# Altium PCB AP.PcbDoc (part 2 of 3)
Units mm, origin at the board's own origin, x right, y up, seen from the top; angles counter-clockwise.
Board outline 75.1 x 75.1 mm, 2 copper layers (Top Layer, Bottom Layer); 135 components, 138 nets, 746 pads, 286 vias.
Unrouted connection lines stored in the file: 9.
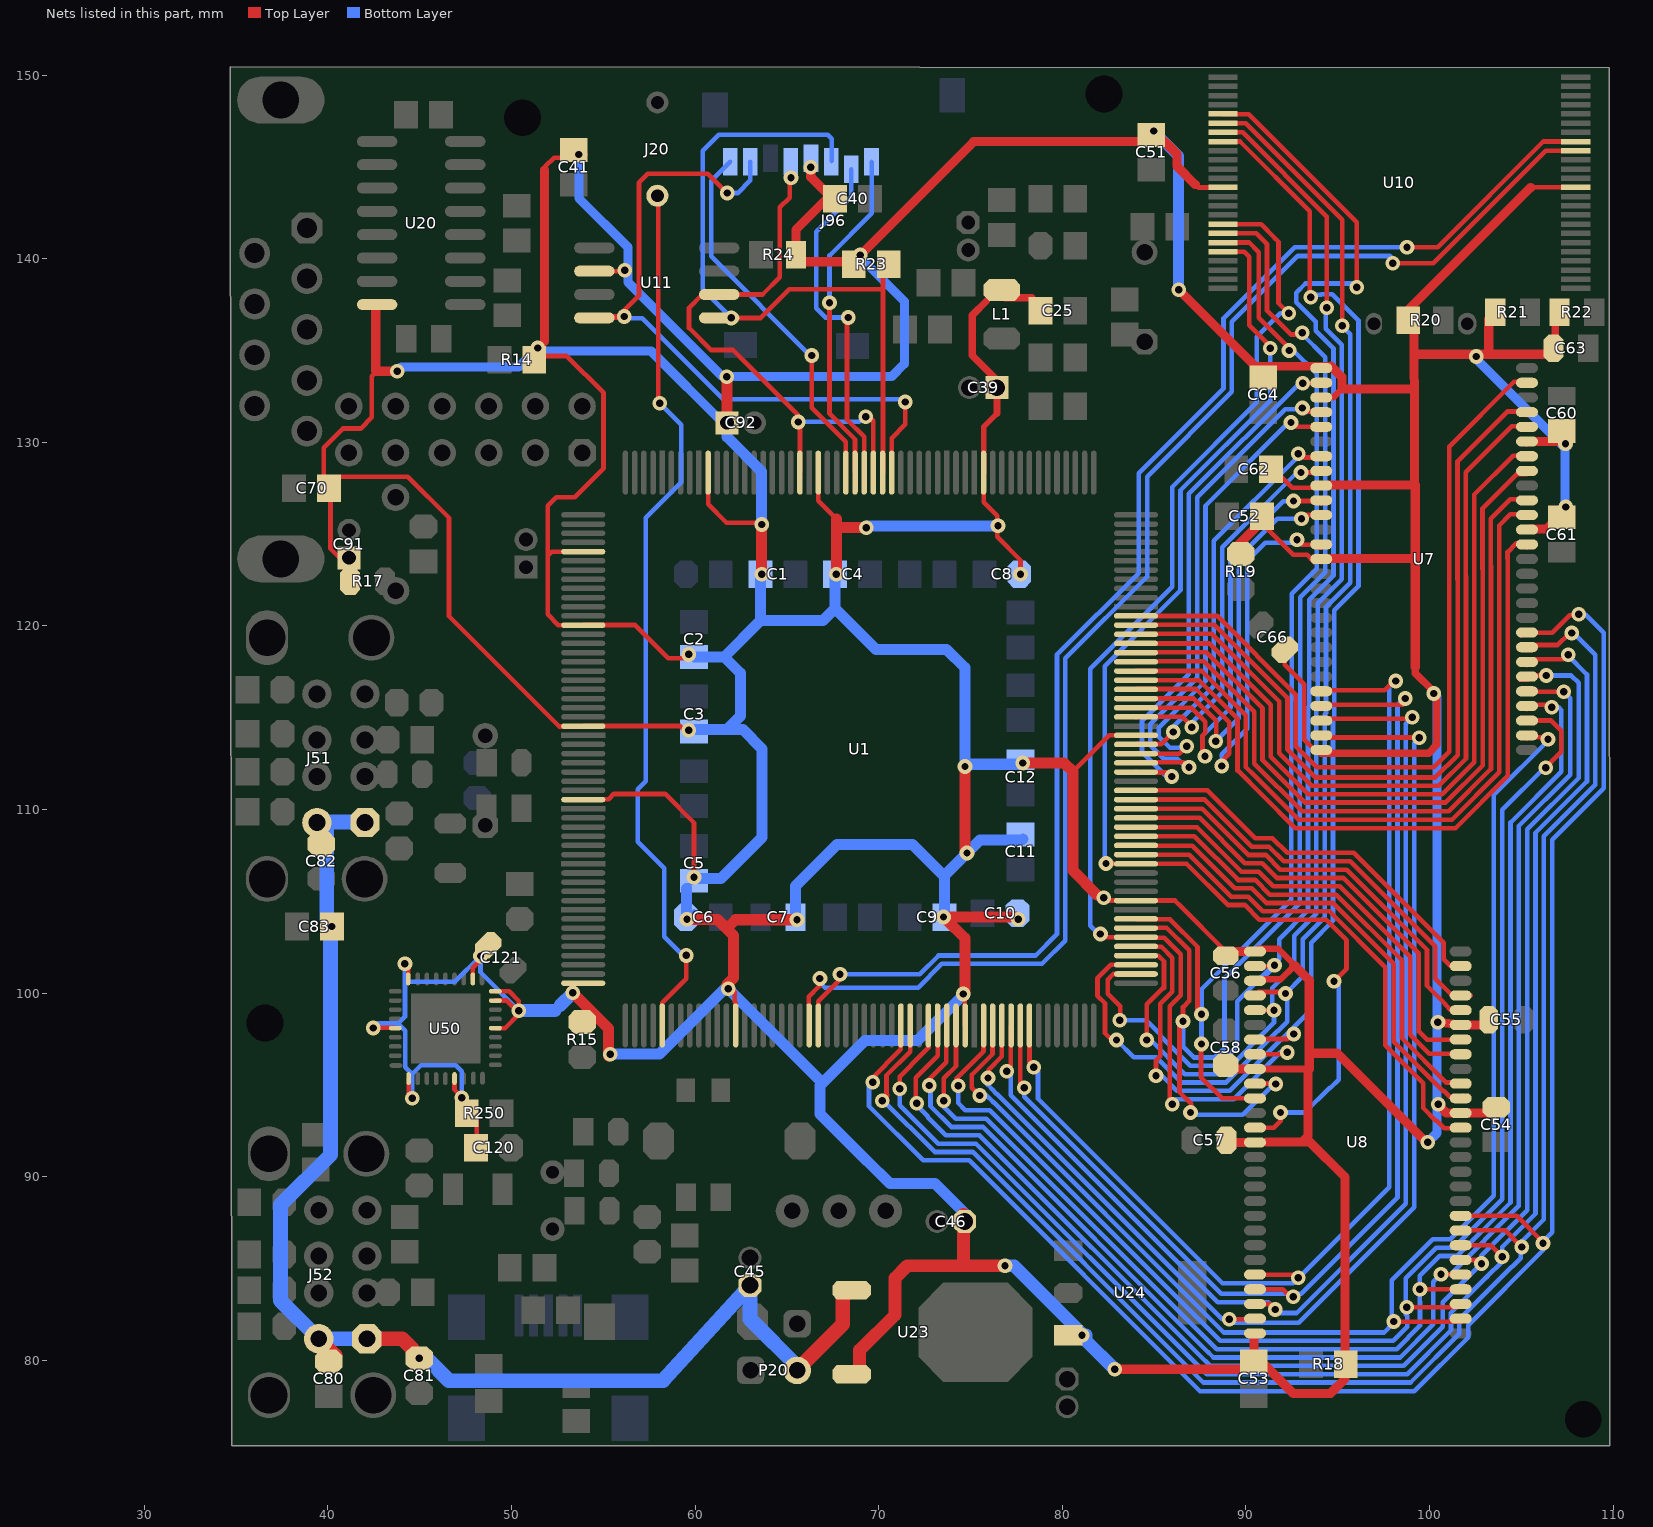
[diagram p2: the nets of this part, all layers, seen from the top]

## Via types
v1: diameter 0.8, hole 0.4, Top Layer to Bottom Layer, 277 vias
v2: diameter 0.66, hole 0.33, Top Layer to Bottom Layer, tented top, 9 vias

## Nets (pads, with @x,y where several pads share a name; then routed paths per layer and width w, separated by ;. In a path a pad name is that pad's centre, name@x,y a point inside that pad or via, vN(x,y) a via of type N, cw(c..) or ccw(c..) an arc to the next point about the centre after c; other vN are vias at no path point) (continued)
3V3: C1.2 C2.2 C3.2 C4.2 C5.2 C6.2 C7.2 C8.2 C9.2 C10.2 C11.2 C12.2 C25.2 C39.1 C40.1 C41.1 C46.1 C51.2 C52.2 C53.2 C54.2 C55.2 C56.2 C57.2 C58.2 C60.1 C61.1 C62.1 C63.1 C64.1 C66.1 C70.2 C91.1 C92.1 C120.1 C121.2 J96.4 L1.2 R14.2 R15.1 R17.1 R18.1 R19.1 R20.2 R21.2 R22.1 R23.2 R24.1 R250.2 U1.5 U1.13 U1.24 U1.32 U1.52 U1.65 U1.90 U1.114 U1.132 U1.169 U1.187 U1.199 U7.1 U7.3 U7.9 U7.14 U7.27 U7.43 U7.49 U8.1 U8.3 U8.9 U8.14 U8.27 U8.43 U8.49 U10.12 U10.37 U11.6 U20.16 U23.3 U24.3 U50.5 U50.10 U50.15 U50.23 U50.26 U50.27 U50.29 U50.36 | length 678.5
  Top Layer w0.2: U1.5@53.866,124.091 U1.5@53.911,124.046
  Top Layer w0.254: C70.2@40.025,127.508 39.775,127.758 39.775,129.7 40.825,130.75 41.787,130.75 42.4,131.363 42.4,133.596 42.679,133.875 ; C70.2@40.066,127.508 40.147,127.427 40.147,124.203 C91.1@41.148,123.202 ; C70.2@40.689,128.131 44.356,128.131 46.6,125.887 46.6,120.525 52.602,114.523 U1.24@52.832,114.523 ; v1@42.499,98.127 43.648,98.127 U50.5@43.675,98.1 ; U20.16@42.611,137.424 U20.16@42.685,137.498 ; v1@44.2,101.575 44.375,101.4 U50.36@44.375,100.775 ; U50.10@44.4,95.35 44.4,94.525 v1@44.6,94.325 ; U50.15@46.9,95.35 46.9,94.735 R250.2@47.865,93.769 ; U50.29@47.9,100.775 47.9,101.377 v1@48.315,101.792 ; 48.116,92.357 R250.2@48.116,93.518 ; v1(48.315,102.025) 48.548,102.025 48.745,102.222 C121.2@48.745,102.604 48.315,102.175 v1@48.315,101.792 ; U50.23@49.125,98.1 49.65,98.1 50.4,98.85 v1(50.4,99.05) 50.4,99.575 49.875,100.1 U50.27@49.125,100.1 ; U50.26@49.125,99.6 49.75,99.6 v1@50.35,99 ; C121.2@49.277,102.754 v1@48.315,101.792 ; R14.2@51.242,134.505 R14.2@51.435,134.698 ; 51.8,135.505 v1(51.435,135.14) R14.2@51.435,134.698 ; 51.85,145.025 52.324,145.499 53.524,145.499 53.583,145.557 53.583,145.583 v1(53.675,145.675) C41.1@54.05,145.675 ; 51.98,123.8 51.98,126.541 52.451,127.012 53.442,127.012 55.016,128.587 55.016,132.702 53.02,134.698 R14.2@51.435,134.698 ; v1@53.34,100.017 v1(53.342,100.017) ; U1.32@53.911,110.546 53.934,110.569 55.294,110.569 55.575,110.85 58.375,110.85 59.944,109.281 v1(59.944,106.311) ; U1.24@53.911,114.546 53.913,114.548 59.2,114.548 59.423,114.325 v1(59.65,114.325) ; U1.5@53.911,124.046 52.197,124.046 51.975,123.824 51.975,120.63 52.559,120.046 U1.13@53.911,120.046 53.913,120.048 56.748,120.048 58.547,118.249 59.563,118.249 59.65,118.336 v1(59.65,118.45) ; U11.6@54.512,139.319 56.294,139.319 v1@56.375,139.4 ; U1.199@60.711,128.346 60.713,128.344 60.713,126.624 61.712,125.625 63.275,125.625 63.501,125.399 v1@63.627,125.273 ; 61.722,100.723 61.69,100.691 v1@61.69,100.536 ; v1@61.776,100.45 v1@61.69,100.536 ; U1.65@62.211,98.246 62.209,98.248 62.209,99.473 62.161,99.521 62.161,100.065 v1@61.69,100.536 ; U1.187@66.711,128.346 66.713,128.344 66.713,126.812 67.691,125.834 ; R23.2@68.646,140.208 68.675,140.179 68.979,140.179 v1(69,140.2) ; v1(73.533,104.152) v1@73.66,104.025 ; v1@74.688,99.593 74.688,98.269 U1.90@74.711,98.246 U1.90@74.724,98.233 ; U1.169@75.711,128.346 75.713,128.344 75.713,126.737 76.454,125.996 76.454,124.853 77.724,123.583 v1(77.724,122.821) ; C39.1@76.442,132.981 C39.1@76.442,133.383 ; v1@77.47,104.152 v1(77.597,104.025) ; C25.2@78.331,137.875 C25.2@78.806,137.4 ; 80.572,112.066 82.55,114.044 84.009,114.044 U1.132@84.011,114.046 U1.132@84.034,114.023 ; v1@81.915,105.35 82.2,105.35 82.213,105.338 82.502,105.048 84.009,105.048 U1.114@84.011,105.046 84.013,105.048 86.134,105.048 86.444,104.738 86.444,104.733 88.806,102.371 C56.2@88.901,102.276 ; C51.2@84.7,147.125 84.812,147.132 C51.2@84.814,147.132 ; C51.2@84.711,147.236 C51.2@84.814,147.132 ; 87.244,144.035 87.398,143.881 U10.37@88.753,143.881 ; C57.2@88.834,91.44 89.015,91.44 89.5,91.925 ; U8.27@90.444,81.424 U8.27@90.496,81.476 ; U8.14@90.447,91.925 U8.14@90.496,91.876 91.15,91.876 91.126,91.9 ; C52.2@90.811,125.636 92.572,123.875 93.334,123.875 93.705,123.504 U7.14@93.705,123.481 ; C62.1@91.025,128.175 91.875,128.175 92.521,127.529 93.989,127.529 U7.9@94.102,127.642 ; C66.1@92.112,118.708 92.112,117.888 93.175,116.825 93.175,113.793 93.527,113.44 ; U7.14@94.029,123.545 U7.14@94.102,123.472 ; R20.2@98.7,136.425 R20.2@98.7,137.075 ; v1@100.475,93.917 v1(100.475,93.953) ; U8.43@101.32,93.476 U8.43@101.696,93.476 U8.43@101.688,93.484 ; C54.2@103.488,93.476 C54.2@103.801,93.789 ; U7.49@105.302,129.872 U7.49@105.382,129.952 ; 105.509,143.884 107.176,143.884 107.178,143.882 107.181,143.884 107.95,143.884 U10.12@107.953,143.881 ; 106.352,125.275 C61.1@107.301,126.224 ; v1@107.4,129.675 v1(107.4,129.925) ; C51.2@84.814,147.132 84.922,147.139 84.948,147.165 84.959,147.165 84.975,147.149 C51.2@84.975,146.972 ; C51.2@84.814,147.132 C51.2@84.975,146.972 ; C51.2@84.814,147.132 C51.2@84.975,146.972
  Top Layer w0.3: U1.169@75.711,128.346 75.711,130.841 76.442,131.572
  Top Layer w0.35: U8.3@90.496,100.676 90.576,100.755 91.899,100.755 92.6,101.456 92.6,101.475 92.6,101.58 91.755,102.425 91.732,102.425 ; U8.1@90.496,102.276 90.646,102.425 91.625,102.425 ; U7.3@94.102,132.442 94.755,132.442 95.225,132.912
  Top Layer w0.4: 75.875,137.7 75.1,136.925 75.1,134.725 C39.1@76.442,133.383 ; 76.442,131.572 C39.1@76.442,132.981 ; L1.2@76.883,137.875 C25.2@78.331,137.875 ; U8.9@90.496,95.876 93.382,95.876 ; U7.27@94.102,113.072 99.947,113.072 100.4,113.525 100.4,116.15 v1(100.225,116.325) 100.225,116.431 99.225,117.431 99.225,117.75 ; C63.1@106.85,135.65 R22.1@106.85,136.575
  Top Layer w0.45: C64.1@90.506,134.143 U7.1@94.632,134.143
  Top Layer w0.5: U20.16@42.611,137.424 42.611,133.903 42.679,133.875 v1(43.775,133.875) ; 51.8,135.505 51.8,144.825 ; R24.1@65.493,140.208 65.493,141.568 C40.1@67.181,143.256 ; R24.1@65.725,139.838 R23.2@68.2,139.838 ; v1(66.3,144.975) 66.3,144.45 67.27,143.48 C40.1@67.406,143.48 ; R23.2@69.127,140.327 75.175,146.375 C51.2@84.378,146.375 ; v1(82.85,79.525) 90.001,79.525 C53.2@90.424,79.948 ; C51.2@84.793,146.789 C51.2@84.378,146.375 ; v1(86.348,138.302) C64.1@90.506,134.143 ; 87.244,144.035 86.247,145.032 86.247,145.7 84.975,146.972 84.964,146.961 C51.2@84.378,146.375 ; C56.2@88.901,102.276 U8.1@90.496,102.276 ; C57.2@89.375,91.875 U8.14@90.322,91.875 ; R19.1@89.459,124.284 C52.2@90.811,125.636 ; C58.2@89.495,95.876 U8.9@90.496,95.876 ; U8.27@90.444,81.424 90.444,80.331 92.575,78.2 94.6,78.2 95.4,79 95.4,89.975 93.475,91.9 91.126,91.9 ; 92.6,101.475 92.682,101.475 93.45,100.707 93.45,95.876 ; 93.075,91.9 93.382,92.207 93.382,95.876 ; 93.45,96.725 94.975,96.725 99.841,91.859 v1@99.841,91.816 ; U7.9@94.305,127.675 99.225,127.675 99.225,117.75 ; U7.1@94.632,134.143 95.225,133.55 95.225,132.912 ; U7.14@94.676,123.67 99,123.67 ; 95.272,132.906 99.15,132.906 ; R20.2@98.7,137.075 105.509,143.884 ; R20.2@98.7,137.16 99.15,136.71 99.15,134.35 99.175,132.481 99.175,127.7 ; 99.15,134.8 C63.1@106.625,134.8 ; v1(100.455,98.422) U8.49@101.696,98.276 C55.2@102.776,98.276 ; v1@100.475,93.917 100.908,93.484 U8.43@101.688,93.484 ; U8.43@101.696,93.476 C54.2@103.488,93.476 ; 103.225,134.875 R21.2@103.225,136.683 ; U7.49@105.382,130.052 C60.1@107.188,130.052 ; U7.43@105.505,125.275 106.352,125.275 C61.1@107.35,126.273
  Top Layer w0.6: v1@53.341,100.018 v1(53.342,100.017) 55.287,98.071 v1@55.287,96.587 ; v1(59.563,104.025) 61.214,104.025 61.722,103.517 ; v1(61.723,133.575) 61.75,133.548 C92.1@61.75,131.064 ; v1@61.751,100.476 62.1,100.825 62.1,103.139 61.722,103.517 ; v1(63.627,122.821) v1@63.627,125.273 ; v1(65.55,104) 62.205,104 61.722,103.517 ; v1(67.691,122.821) 67.691,125.35 ; 67.691,125.834 67.691,125.35 ; v1(69.331,125.35) 67.691,125.35 ; v1(73.533,104.152) v1@77.47,104.152 ; v1@73.66,104.025 74.688,102.997 v1@74.688,99.96 ; v1(74.7,112.35) 74.7,107.75 v1(74.812,107.637) ; v1(77.851,112.534) 80.104,112.534 80.572,112.066 80.572,106.675 81.897,105.35 v1@81.915,105.35
  Top Layer w0.7: R17.1@41.148,122.073 C91.1@41.148,123.71 ; U23.3@68.964,79.714 68.964,80.564 70.882,82.482 70.882,84.482 71.557,85.157 74.625,85.157 ; C46.1@74.625,87.96 74.625,85.157 ; v1(76.882,85.157) 74.625,85.157
  Bottom Layer w0.254: v1(42.477,98.105) 42.722,98.35 43.825,98.35 ; v1(43.775,133.875) v1@44,134.1 ; v1(44.2,101.6) 44.2,100.625 ; v1(44.6,94.275) 44.6,95.6 ; v1(47.3,94.3) 47.3,95.748 46.973,96.075 45.075,96.075 44.6,95.6 ; v1(50.4,99.05) 48.315,101.135 v1(48.315,102.025) 46.915,100.625 44.2,100.625 ; v1(51.435,135.14) v1@51.6,134.975 ; v1@56.35,139.4 56.35,140.625 ; C6.2@59.502,104.025 59.532,104.055 C6.2@59.944,104.467 ; C5.2@59.533,105.711 C5.2@59.944,106.123 59.948,106.127 C5.2@59.948,106.307 ; v1(59.944,106.311) C5.2@59.948,106.307 ; C3.2@59.944,114.251 C3.2@60.043,114.35 ; C5.2@60.005,106.25 C5.2@59.948,106.307 ; C1.2@63.566,122.821 v1(63.627,122.821) ; C4.2@67.63,122.821 v1(67.691,122.821) ; v1@74.397,99.95 74.402,99.955 74.629,99.955 74.672,99.912 74.672,99.905 74.668,99.901 v1(74.607,99.96) ; C8.2@77.658,122.821 v1(77.724,122.821) ; v1@99.841,91.816 99.839,91.818 99.839,91.821 v1@99.841,91.823 ; v1@107.377,126.523 v1(107.425,126.475) ; 43.825,98.35 44.225,97.95 44.225,95.975 44.6,95.6 ; 43.825,98.35 44.2,98.725 44.2,100.625
  Bottom Layer w0.4: v1(100.225,116.325) v1@100.4,116.15 ; v1@100.4,98.367 v1@100.406,98.361
  Bottom Layer w0.5: v1@44,134.1 50.395,134.1 v1(51.435,135.14) ; v1@51.6,134.975 57.602,134.975 C92.1@61.624,130.954 ; v1(53.675,145.675) 53.675,143.3 56.35,140.625 56.35,139.4 56.35,138.725 61.488,133.587 70.712,133.587 71.4,134.275 71.4,137.675 69.1,139.975 v1@69.1,140.3 ; v1@99.841,91.823 100.406,92.388 v1@100.406,98.361 ; v1@100.4,98.367 v1@100.4,116.15 ; v1@102.476,134.601 107.377,129.7 v1@107.377,126.523
  Bottom Layer w0.6: v1@55.575,96.7 58.075,96.7 61.716,100.341 66.8,95.258 ; C6.2@59.533,104.056 C5.2@59.533,105.711 ; C2.2@59.944,118.315 61.59,118.315 63.566,120.291 ; C5.2@60.005,106.25 61.425,106.25 63.65,108.475 63.65,113.3 62.6,114.35 61.725,114.35 ; C3.2@60.043,114.35 61.725,114.35 ; 61.59,118.31 62.475,117.425 62.475,115.1 61.725,114.35 ; C92.1@61.734,131.064 61.734,130.302 63.627,128.409 v1(63.627,125.525) ; C1.2@63.566,122.821 63.566,120.291 ; C7.2@65.466,104.14 65.466,105.841 67.725,108.1 71.85,108.1 73.594,106.356 ; C4.2@67.63,122.821 67.63,120.955 ; v1(69.331,125.35) 69.431,125.45 v1(76.5,125.45) ; 69.36,90.87 66.8,93.43 66.8,94.975 69.25,97.425 72.125,97.425 v1@74.634,99.934 ; 69.365,90.875 70.615,89.625 73.075,89.625 74.68,88.02 C46.1@74.68,87.567 ; C9.2@73.594,104.025 C9.2@73.594,104.14 73.594,104.152 73.594,106.356 ; C11.2@77.724,108.35 75.525,108.35 v1(74.812,107.637) 73.594,106.419 73.594,106.356 ; C12.2@77.724,112.468 74.7,112.468 74.7,117.725 73.7,118.725 69.86,118.725 67.63,120.955 ; C11.2@77.797,108.35 C11.2@77.851,108.404 ; v1(84.975,146.95) 86.334,145.591 86.334,138.316 v1(86.348,138.302) ; 63.566,120.291 66.966,120.291 67.63,120.955
  Bottom Layer w0.7: v1(50.4,99.05) 52.373,99.05 ; 52.636,99.314 v1@53.34,100.017 ; v1(76.882,85.157) 77.368,85.157 v1@81.111,81.414 ; v1@81.297,81.378 81.297,81.078 v1(82.85,79.525)
  other v1: 81.075,81.378 99.905,91.879 55.375,96.675 61.801,100.25 82.252,105.194 102.55,134.675 56.175,139.375
5V: C45.1 C80.1 C81.1 C82.1 C83.1 J51.1 J51.5 J52.1 J52.5 P20.2 U23.1 | length 72
  Top Layer w0.254: C83.1@40.423,103.783 C83.1@40.574,103.632
  Top Layer w0.8: J52.5@39.466,81.209 C80.1@40.388,80.288 ; J52.1@42.126,81.18 42.132,81.174 44.051,81.174 C81.1@44.597,80.628 ; P20.2@65.264,79.527 65.602,79.527 68.05,81.975 68.05,83.45 68.361,83.761 U23.1@69.098,83.761
  Bottom Layer w0.8: v1(40.224,103.632) 40.373,103.632 40.4,103.605 v1@40.4,103.575 ; J51.1@41.619,109.175 41.469,109.325 40.125,109.325 39.95,109.15 39.95,104.025 v1@40.4,103.575 ; J52.1@42.126,81.18 J52.5@39.506,81.18 37.425,83.261 37.425,88.475 40.15,91.2 40.15,103.325 v1@40.4,103.575 ; v1@44.916,80.059 45.441,80.059 46.6,78.9 58.263,78.9 C45.1@62.992,84.086 62.992,82.258 P20.2@65.678,79.572
  other v1: 44.979,80.123
A2: U1.97 U7.23 U8.23 | length 64.3
  Top Layer w0.254: U1.97@78.211,98.246 78.211,96.214 v1(78.45,95.975) ; U8.23@90.496,84.676 90.873,84.676 92.525,84.676 92.701,84.499 v1(92.85,84.499) ; U7.23@94.102,116.272 94.33,116.5 97.55,116.5 98.086,117.036 98.125,117.036 v1(98.155,117.006)
  Bottom Layer w0.254: v1(78.45,95.975) 78.675,95.75 78.675,94.25 88.723,84.202 92.577,84.202 97.803,89.428 97.803,113.227 97.799,113.231 97.799,116.749 98.086,117.036 98.125,117.036 v1(98.155,117.006)
A3: U1.96 U7.24 U8.24 | length 65.3
  Top Layer w0.254: U1.96@77.711,98.246 77.711,95.064 v1(77.925,94.849) ; U8.24@90.496,83.876 91.999,83.876 92.4,83.475 v1(92.575,83.475) ; U7.24@94.102,115.472 94.187,115.557 94.33,115.7 98.55,115.7 v1@98.688,115.838
  Bottom Layer w0.254: v1(77.925,94.849) 77.925,94.358 88.658,83.625 93.004,83.625 98.257,88.878 98.257,113.415 98.253,113.42 98.253,115.678 98.625,116.05 v1(98.675,116.05)
A4: U1.95 U7.25 U8.25 | length 65.6
  Top Layer w0.254: v1(76.975,95.75) 76.967,95.75 76.948,95.769 76.948,95.834 77.198,96.083 77.198,98.233 U1.95@77.211,98.246 ; U8.25@90.496,83.076 91.299,83.076 91.627,82.748 v1(91.6,82.775) ; U7.25@94.38,114.95 98.818,114.95 v1@98.891,114.877 ; v1@98.891,114.867 98.902,114.856 98.905,114.856 99.05,115.001 v1(99.05,115.025)
  Bottom Layer w0.254: v1(76.975,95.75) 77.198,95.527 77.198,94.443 88.47,83.171 91.204,83.171 91.791,82.584 92.759,82.584 98.711,88.536 98.711,113.603 98.707,113.608 98.707,114.682 v1(99.05,115.025)
A5: U1.94 U7.26 U8.26 | length 67.6
  Top Layer w0.254: v1@76,95.38 76,95.841 76.711,96.552 U1.94@76.711,98.246 ; v1(89.1,82.25) 90.471,82.25 U8.26@90.496,82.276 U8.26@90.873,82.276 ; U7.26@94.102,114.1 94.277,113.925 99.292,113.925 99.301,113.934 99.409,113.934 v1(99.434,113.909)
  Bottom Layer w0.254: v1@75.925,95.38 75.925,95.028 76.227,94.726 76.227,94.719 76.414,94.532 76.429,94.532 88.711,82.25 v1(89.1,82.25) 89.302,82.048 92.873,82.048 99.165,88.34 99.165,113.64 v1(99.434,113.909)
  other v1: 75.957,95.383
A6: U1.93 U7.29 U8.29 | length 73.8
  Top Layer w0.254: v1(75.5,94.425) 75.075,94.85 75.075,95.558 75.171,95.654 76.2,96.683 76.2,98.235 U1.93@76.211,98.246 ; v1(98.05,82.125) 98.075,82.1 101.748,82.1 101.808,82.159 101.808,82.164 U8.29@101.696,82.276 ; U7.29@105.302,113.872 105.377,113.947 106.078,113.947 106.2,113.825 v1(106.45,113.825)
  Bottom Layer w0.254: v1(75.5,94.425) 75.879,94.425 76.226,94.078 76.241,94.078 88.523,81.796 88.526,81.796 88.799,81.523 97.523,81.523 97.95,81.95 97.95,84.374 100.176,86.6 101.124,86.6 103.501,88.977 103.501,110.801 v1@106.487,113.787 ; v1(98.05,82.125) v1@98.05,82.35
A7: U1.92 U7.30 U8.30 | length 76.7
  Top Layer w0.254: v1(74.329,94.963) 74.241,95.051 74.241,95.366 75.5,96.625 75.711,96.836 U1.92@75.711,98.246 ; v1(98.75,82.9) 101.521,82.9 U8.30@101.696,83.076 ; U7.30@105.505,114.875 105.532,114.848 106.627,114.848 107.177,114.298 107.177,113.152 106.325,112.3 v1(106.325,112.275)
  Bottom Layer w0.254: v1@74.562,94.963 v1(74.329,94.963) 74.329,94.021 74.726,93.624 76.053,93.624 88.335,81.342 88.338,81.342 88.611,81.069 98.022,81.069 98.777,81.824 98.777,82.426 ; 98.7,82.503 98.7,84.482 100.364,86.146 101.312,86.146 103.955,88.789 103.955,109.98 106.268,112.293 106.307,112.293 v1(106.325,112.275)
A8: U1.89 U7.31 U8.31 | length 78.2
  Top Layer w0.254: v1(73.55,94.15) 73.55,95.36 74.211,96.021 U1.89@74.211,98.246 ; v1@99.476,83.876 U8.31@101.696,83.876 ; U7.31@105.302,115.472 105.53,115.7 106.425,115.7 v1@106.6,115.525
  Bottom Layer w0.254: v1(73.55,94.15) 73.55,93.825 74.205,93.17 75.865,93.17 88.147,80.888 88.15,80.888 88.423,80.615 98.21,80.615 99.477,81.882 99.477,83.201 99.475,83.203 99.475,84.615 100.552,85.692 101.5,85.692 104.409,88.601 104.409,109.294 107.177,112.062 107.177,115.423 107.025,115.575 v1(106.65,115.575)
  other v1: 99.475,83.875
A9: U1.88 U7.32 U8.32 | length 79.7
  Top Layer w0.254: v1@72.7,94.975 72.7,95.26 73.688,96.248 73.688,98.223 U1.88@73.711,98.246 ; v1(100.625,84.7) U8.32@101.672,84.7 ; U8.32@101.696,84.676 U8.32@102.183,84.676 ; U7.32@105.825,116.425 v1(107.3,116.425)
  Bottom Layer w0.254: v1(72.75,94.975) 72.823,94.902 72.823,93.849 73.956,92.716 75.677,92.716 87.959,80.434 87.962,80.434 88.235,80.161 98.398,80.161 100.202,81.965 100.202,84.277 v1(100.625,84.7) 101.15,84.7 104.863,88.413 104.863,109.106 107.659,111.902 107.659,116.066 v1(107.3,116.425)
A10: U1.87 U7.33 U8.33 | length 83.1
  Top Layer w0.254: v1@72.019,94 72.019,95.394 73.211,96.586 U1.87@73.211,98.246 ; U8.33@101.696,85.476 101.704,85.467 102.668,85.467 v1@102.825,85.31 ; U7.33@104.925,117.072 105.372,117.072 105.6,117.3 v1(106.35,117.3) ; v1(106.35,117.3) 106.366,117.284 v1(106.35,117.3)
  Bottom Layer w0.254: v1@71.967,94 72.679,93.288 72.679,93.246 73.663,92.262 75.489,92.262 87.771,79.98 87.774,79.98 88.047,79.707 98.586,79.707 100.713,81.834 100.713,83.163 v1(102.825,85.275) 102.825,85.694 105.317,88.186 105.317,108.918 108.117,111.718 108.117,116.908 107.725,117.3 v1(106.35,117.3)
  other v1: 72.075,94
A11: U1.86 U7.34 U8.34 | length 87.3
  Top Layer w0.254: v1(71.15,94.8) 71.15,95.46 72.409,96.719 72.711,97.021 U1.86@72.711,98.246 ; U8.34@101.696,86.276 103.324,86.276 v1(103.95,85.65) ; U7.34@105.302,117.872 105.61,118.181 107.306,118.181 v1(107.55,118.425)
  Bottom Layer w0.254: v1(71.15,94.8) 71.15,93.897 73.239,91.808 75.301,91.808 87.583,79.526 87.586,79.526 87.859,79.253 98.774,79.253 101.167,81.646 101.167,82.592 103.123,84.548 103.126,84.548 103.95,85.372 103.95,86.177 105.771,87.998 105.771,108.73 108.571,111.53 108.571,117.356 107.55,118.377 v1(107.55,118.425)
A13: U1.84 U7.35 U8.35 | length 91.6
  Top Layer w0.254: v1(70.2,94.15) 70.45,94.4 70.45,94.472 70.423,94.499 70.423,95.519 71.711,96.807 U1.84@71.711,98.246 ; U8.35@101.695,87.143 101.695,87.077 U8.35@101.696,87.076 ; U8.35@101.7,87.083 104.117,87.083 v1(105.025,86.175) ; U7.35@105.202,118.782 105.202,118.771 105.217,118.757 U7.35@105.302,118.672 ; U7.35@105.775,118.964 106.989,118.964 107.6,119.575 v1@107.749,119.575
  Bottom Layer w0.254: v1(70.2,94.15) 70.255,94.15 73.051,91.354 75.113,91.354 87.395,79.072 87.398,79.072 87.671,78.799 98.962,78.799 101.621,81.458 101.621,82.238 104.481,85.098 104.501,85.098 104.975,85.572 104.975,86.425 106.225,87.675 106.225,108.542 109.025,111.342 109.025,118.425 v1@107.794,119.656
  other v1: 107.749,119.612
A14: U1.83 U7.36 U8.36 | length 97.6
  Top Layer w0.254: v1@69.56,95.298 71.211,96.949 U1.83@71.211,98.246 ; v1(69.678,95.155) 69.697,95.155 v1@69.701,95.151 ; U8.36@101.686,87.866 U8.36@101.687,87.865 ; U8.36@101.696,87.876 104.749,87.876 106.175,86.45 v1(106.175,86.375) ; U7.36@105.001,119.481 105.162,119.642 U7.36@105.302,119.642 105.31,119.634 106.684,119.634 107.625,120.575 108.125,120.575 108.13,120.58 v1(108.13,120.631) ; U8.36@101.687,87.865 101.803,87.769 U8.36@101.687,87.865
  Bottom Layer w0.254: v1(69.678,95.155) 69.473,94.949 69.473,93.849 72.422,90.9 74.925,90.9 87.5,78.325 99.175,78.325 102.1,81.25 102.1,81.925 106.191,86.016 106.191,86.366 106.182,86.375 v1(106.175,86.375) ; v1@106.125,86.425 106.679,86.979 106.679,108.354 109.479,111.154 109.479,119.621 108.5,120.6 v1@108.13,120.6
ALE: U1.74 U10.17 | length 76.5
  Top Layer w0.254: U1.74@66.711,98.246 66.711,99.558 67.85,100.697 v1@67.85,101.025 ; v1(98.775,140.625) 100.442,140.625 106.198,146.381 U10.17@107.953,146.381 U10.17@107.93,146.404
  Bottom Layer w0.254: v1(67.89,101.025) 72.234,101.025 73.258,102.049 78.541,102.049 79.709,103.217 79.709,118.422 84.167,122.88 84.167,128.318 88.782,132.933 88.782,136.756 92.651,140.625 v1(98.775,140.625)
CLE: U1.73 U10.16 | length 78.1
  Top Layer w0.254: U1.73@66.211,98.246 66.234,98.269 66.234,99.291 66.2,99.325 66.2,99.817 66.775,100.392 v1@66.775,100.8 ; v1(98,139.75) 100.209,139.75 106.334,145.875 107.947,145.875 U10.16@107.953,145.881
  Bottom Layer w0.254: v1(66.8,100.8) 66.8,100.575 67.077,100.298 72.149,100.298 73.446,101.595 78.894,101.595 80.163,102.864 80.163,118.234 84.621,122.692 84.621,128.13 89.236,132.745 89.236,136.567 92.819,140.15 97.837,140.15 98,139.987 v1(98,139.75)
CLK: J96.5 U1.181 U1.189 U11.2 | length 30.5
  Top Layer w0.254: v1@65.15,144.325 65.15,143.325 64.616,142.791 64.616,138.991 63.674,138.049 U11.2@61.312,138.049 61.263,138 60.35,138 59.675,137.325 59.675,136.225 60.875,135.025 62.07,135.025 65.625,131.47 v1@65.625,131.125 ; v1(65.628,131.106) 65.644,131.106 65.711,131.039 U1.189@65.711,128.346 ; v1(69.3,131.4) 69.475,131.4 69.711,131.164 U1.181@69.711,128.346
  Bottom Layer w0.254: v1(65.628,131.106) 65.647,131.125 66.688,131.125 66.698,131.115 68.94,131.115 v1@69.263,131.437
  other v1: 65.225,144.4
CMD: J96.3 R23.1 U1.180 U11.1 | length 40.6
  Top Layer w0.254: U11.1@61.312,136.779 61.971,136.779 v1(61.975,136.775) ; U11.1@61.37,136.774 63.574,136.774 65.127,138.327 70.231,138.327 ; U1.180@70.231,128.366 70.231,138.069 70.231,139.296 70.635,139.7 R23.1@70.635,140.208
  Bottom Layer w0.254: v1(61.975,136.775) 60.421,138.329 60.421,145.871 61.3,146.75 67.225,146.75 67.45,146.525 J96.3@67.45,145.318
CS: J20.1 U1.57 | length 48.7
  Top Layer w0.254: J20.1@58,143.725 58,132.2 v1(58.075,132.125) ; U1.57@58.211,98.246 58.211,99.471 59.525,100.785 v1(59.525,102.058)
  Bottom Layer w0.254: v1(58.075,132.125) 59.246,130.954 59.246,127.816 57.319,125.889 57.319,122.625 57.322,122.622 57.322,111.547 56.875,111.1 56.875,108.253 58.327,106.801 58.327,103.068 59.337,102.058 v1(59.525,102.058)
D0: U1.106 U8.2 U10.29 | length 74.8
  Top Layer w0.254: v1@83.15,98.55 83.15,99.3 82.484,99.966 82.484,100.744 82.786,101.046 U1.106@84.011,101.046 ; U10.29@88.753,147.881 88.776,147.858 90.159,147.858 96.036,141.981 v1(96.036,138.439) ; U8.2@90.496,101.476 91.542,101.476 91.554,101.507 v1(91.554,101.53)
  Bottom Layer w0.254: v1(83.125,98.525) 84.562,98.525 85.331,97.756 85.331,97.683 86.966,96.048 88.49,96.048 89.52,97.078 89.52,99.555 90.633,100.668 v1@91.525,101.56 ; 91.1,100.996 91.583,101.479 v1@91.525,101.56 ; v1(96.036,138.439) 95.825,138.65 93.245,138.65 92.748,138.153 92.748,137.63 93.802,136.576 93.802,136.087 94.765,135.125 94.765,122.729 93.456,121.42 93.456,118.772 93.456,115.636 93.378,115.558 93.378,104.503 91.817,102.942 91.817,101.852 v1@91.525,101.56
D1: U1.107 U8.4 U10.30 | length 73.8
  Top Layer w0.254: v1(82.95,97.45) 82.7,97.45 82.325,97.825 82.325,99.456 81.915,99.866 81.915,100.817 82.644,101.546 U1.107@84.011,101.546 ; U10.30@88.753,147.381 89.994,147.381 95.25,142.125 v1(95.25,136.35) ; U8.4@90.496,99.876 90.556,99.936 90.686,100.065 v1@92.225,100.065
  Bottom Layer w0.254: v1(82.95,97.45) 83.89,96.51 85.118,96.51 86.489,95.14 88.919,95.14 91.736,97.956 91.772,97.956 91.873,98.057 91.873,98.076 92.253,98.456 92.253,99.947 v1@92.225,99.975 ; v1(92.154,99.98) 93.096,100.921 93.096,102.937 94.286,104.127 94.286,115.182 94.364,115.26 94.364,119.148 94.364,121.044 95.673,122.353 95.673,135.877 v1@95.225,136.325
D2: U1.108 U8.5 U10.31 | length 69.7
  Top Layer w0.254: U1.108@84.011,102.046 85.236,102.046 85.538,101.744 85.538,100.275 85.475,100.275 84.604,99.404 v1(84.604,97.455) ; U10.31@88.753,146.881 89.819,146.881 94.405,142.295 v1(94.405,137.332) ; U8.5@90.496,99.076 v1(91.526,99.076)
  Bottom Layer w0.254: v1(84.604,97.455) 84.604,97.452 84.606,97.45 84.82,97.45 86.677,95.594 88.731,95.594 91.526,98.388 v1(91.526,99.076) 91.427,99.174 91.427,100.284 92.637,101.493 92.637,103.12 93.832,104.315 93.832,115.37 93.91,115.448 93.91,118.96 93.91,121.232 95.219,122.541 95.219,135.313 94.35,136.181 94.35,137.291 94.391,137.332 v1(94.405,137.332)
D3: U1.109 U8.7 U10.32 | length 75.1
  Top Layer w0.254: U1.109@84.011,102.546 84.034,102.523 85.401,102.523 85.992,101.932 85.992,100.087 85.325,99.42 85.325,97.762 85.331,97.756 85.331,96.556 85.1,96.325 v1(85.1,95.5) ; U10.32@88.753,146.381 89.677,146.381 93.475,142.583 93.475,137.957 93.525,137.907 v1(93.53,137.907) ; U8.7@90.496,97.476 90.523,97.502 92.266,97.502 v1@92.539,97.775
  Bottom Layer w0.254: v1(85.1,95.5) 85.429,95.5 86.243,94.686 89.107,94.686 91.924,97.502 91.96,97.502 v1@92.439,97.981 ; v1(92.6,97.775) 92.6,97.82 v1@92.439,97.981 ; v1(93.53,137.907) 93.525,137.907 93.475,137.957 93.475,138 93.517,138.042 94.087,138.042 94.103,138.059 94.706,138.059 96.127,136.637 96.127,122.165 94.818,120.856 94.818,119.336 94.818,115.071 94.74,114.994 94.74,103.939 93.55,102.749 93.55,99.092 v1@92.439,97.981
D4: U1.110 U8.8 U10.41 | length 69
  Top Layer w0.254: v1@82.125,103.275 82.354,103.046 U1.110@84.011,103.046 84.034,103.023 85.543,103.023 86.455,102.111 86.455,99.9 85.848,99.293 85.848,94.027 85.92,93.955 v1(85.979,93.955) ; U10.41@88.753,141.881 90.824,141.881 91.551,141.154 ; U8.8@90.496,96.676 92.047,96.676 92.076,96.647 92.122,96.647 v1(92.25,96.775) ; 91.551,141.15 91.775,140.926 91.775,137.575 v1(92.325,137.025)
  Bottom Layer w0.254: v1(82.075,103.225) 81.975,103.225 81.525,103.675 81.525,117.67 85.983,122.128 85.983,127.566 90.598,132.181 90.598,135.748 91.875,137.025 v1(92.325,137.025) ; v1(85.979,93.955) 85.979,94.004 86.207,94.232 89.332,94.232 91.875,96.775 v1(92.25,96.775)
D5: U1.111 U8.10 U10.42 | length 72.7
  Top Layer w0.254: 85.217,103.569 85.673,103.569 86.909,102.333 86.909,99.579 86.575,99.245 v1(86.575,98.475) ; v1@86.6,98.45 86.38,98.23 86.38,94.62 87.025,93.975 87.025,93.499 87.022,93.496 86.988,93.496 v1(86.979,93.505) ; U10.42@88.753,141.381 90.562,141.381 91.15,140.793 91.15,137.172 92.448,135.874 92.974,135.874 v1(93.075,135.975) ; U8.10@90.496,95.076 90.502,95.082 91.613,95.082 91.625,95.07 v1(91.625,95.054)
  Bottom Layer w0.254: v1(86.575,98.475) 86.575,97.081 87.154,96.502 88.302,96.502 88.835,97.035 88.835,100.818 92.924,104.907 92.924,115.746 92.954,115.776 92.954,121.56 94.311,122.917 94.311,134.639 v1@93.025,135.925 ; v1(86.979,93.505) 87.109,93.375 89.825,93.375 91.504,95.054 v1(91.625,95.054)
D6: U1.112 U8.11 U10.43 | length 62.4
  Top Layer w0.254: U1.112@84.011,104.046 84.034,104.023 85.861,104.023 87.363,102.522 87.363,99.056 v1@87.57,98.848 ; v1(87.579,97.23) 87.55,97.2 87.55,95.425 88.699,94.276 U8.11@90.496,94.276 U8.11@90.356,94.416 ; U10.43@88.753,140.881 88.755,140.883 90.171,140.883 90.643,140.411 ; 90.643,140.4 90.696,140.347 90.696,136.782 92.35,135.128 v1(92.35,135)
  Bottom Layer w0.254: v1@87.577,98.946 87.577,100.202 92.47,105.095 92.47,115.934 92.5,115.964 92.5,121.749 93.857,123.105 93.857,133.732 92.562,135.026 92.376,135.026 v1(92.35,135) ; v1(87.579,97.23) v1@87.579,98.855
  other v1: 87.577,98.855
D7: U1.118 U8.13 U10.44 | length 67.6
  Top Layer w0.254: v1@82.45,107.25 82.653,107.046 U1.118@84.011,107.046 86.763,107.046 89.003,104.806 89.939,104.806 90.737,104.008 94.362,104.008 95.481,102.889 95.481,101.331 v1(94.8,100.65) ; U10.44@88.753,140.381 89.911,140.381 90.189,140.103 ; 90.189,140.075 90.189,136.375 91.325,135.239 v1(91.325,135.125) ; U8.13@90.496,92.676 91.526,92.676 91.879,93.03 v1(91.879,93.505)
  Bottom Layer w0.254: v1(82.379,107.067) 82.342,107.067 82.305,107.104 82.305,117.808 86.437,121.94 86.437,127.378 91.325,132.266 v1(91.325,135.125) ; v1(91.879,93.505) 93.208,93.505 94.556,94.853 94.606,94.853 95.05,95.297 95.05,100.4 v1(94.8,100.65)
D8: U1.119 U8.42 | length 27.2
  Top Layer w0.254: U1.119@84.011,107.546 84.017,107.54 86.911,107.54 89.191,105.26 90.127,105.26 90.925,104.462 94.55,104.462 97.591,101.421 97.591,97.165 99.652,95.105 99.652,93.748 100.339,93.06 100.394,93.06 100.806,92.649 101.67,92.649 U8.42@101.696,92.676 U8.42@101.726,92.646
D9: U1.120 U8.44 | length 26.8
  Top Layer w0.2: U8.44@101.924,94.276 U8.44@101.874,94.226 ; U8.44@101.568,94.404 101.498,94.335 U8.44@101.568,94.404 ; U8.44@101.568,94.404 101.574,94.411 U8.44@101.696,94.289 ; U8.44@101.696,94.289 U8.44@101.709,94.289 ; U8.44@101.696,94.289 U8.44@101.709,94.289 ; U8.44@101.709,94.289 101.811,94.289 U8.44@101.874,94.226 ; U8.44@101.874,94.226 101.938,94.162 101.81,94.162 U8.44@101.874,94.226
  Top Layer w0.254: U1.120@84.011,108.046 84.029,108.028 87.069,108.028 89.383,105.714 90.315,105.714 91.113,104.916 94.738,104.916 98.045,101.609 98.045,97.354 100.719,94.68 100.776,94.68 101.121,94.335 U8.44@101.498,94.335 ; U8.44@101.696,94.276 101.709,94.289 U8.44@101.819,94.398
D10: U1.121 U8.45 | length 25.9
  Top Layer w0.2: U8.45@101.671,95.051 U8.45@101.696,95.076 U8.45@101.747,95.025
  Top Layer w0.254: U1.121@84.011,108.546 87.193,108.546 89.571,106.168 90.503,106.168 91.301,105.37 94.926,105.37 98.499,101.797 98.499,97.542 100.906,95.135 101.637,95.135 U8.45@101.696,95.076
D11: U1.122 U8.47 | length 25.3
  Top Layer w0.2: U8.47@101.67,96.702 U8.47@101.696,96.676
  Top Layer w0.254: U1.122@84.011,109.046 87.335,109.046 89.759,106.622 90.691,106.622 91.489,105.824 95.114,105.824 98.953,101.985 98.953,97.73 99.981,96.702 U8.47@101.67,96.702
D12: U1.123 U8.48 | length 25.5
  Top Layer w0.2: U8.48@101.696,97.476 U8.48@102.034,97.476
  Top Layer w0.254: U1.123@84.011,109.546 87.477,109.546 89.947,107.076 90.879,107.076 91.677,106.278 95.302,106.278 99.407,102.173 99.407,97.918 99.865,97.46 101.681,97.46 U8.48@101.696,97.476
D13: U1.124 U8.50 | length 24.9
  Top Layer w0.2: U1.124@84.011,110.046 U1.124@85.011,110.046
  Top Layer w0.254: U1.124@84.011,110.046 87.619,110.046 90.135,107.53 91.067,107.53 91.865,106.732 95.49,106.732 99.861,102.361 99.861,100.406 100.854,99.413 100.854,99.384 101.162,99.076 U8.50@101.696,99.076 101.747,99.025 U8.50@102.137,99.025
D14: U1.125 U8.51 | length 23.7
  Top Layer w0.254: U1.125@84.011,110.546 87.761,110.546 88.177,110.13 90.323,107.984 91.256,107.984 92.054,107.186 95.679,107.186 100.315,102.549 100.315,100.785 101.224,99.876 U8.51@101.696,99.876 U8.51@102.231,99.876
D15: U1.126 U8.53 | length 21.6
  Top Layer w0.254: U1.126@84.011,111.046 87.903,111.046 88.631,110.318 90.511,108.438 91.444,108.438 92.242,107.64 95.867,107.64 100.769,102.737 100.769,101.856 U8.53@101.163,101.462
D16: U1.128 U7.2 | length 28.8
  Top Layer w0.254: U1.128@84.011,112.046 84.034,112.023 85.802,112.023 85.954,111.871 v1(85.954,111.805) ; U7.2@93.709,133.225 v1(93.1,133.225) ; v1(93.1,133.225) 93.1,133.249 v1(93.1,133.225)
  Bottom Layer w0.254: v1@85.975,111.788 85.684,111.788 84.344,113.128 84.344,114.831 86.891,117.378 86.891,127.19 92.926,133.225 v1(93.1,133.225)
D17: U1.129 U7.4 | length 29.2
  Top Layer w0.254: U1.129@84.011,112.546 84.034,112.569 85.259,112.569 85.267,112.577 86.598,112.577 v1@86.887,112.287 ; v1@93.076,131.895 v1(93.076,131.872) 93.273,131.675 93.899,131.675 94.017,131.557 U7.4@94.102,131.472
  Bottom Layer w0.254: v1(86.9,112.3) 86.747,112.3 86.272,112.775 85.515,112.775 84.798,113.491 84.798,114.643 87.345,117.19 87.345,127.002 92.151,131.808 92.754,131.808 92.88,131.682 93.07,131.872 v1(93.076,131.872)
D18: U1.130 U7.5 | length 26.8
  Top Layer w0.254: U1.130@84.011,113.046 86.371,113.046 v1(86.775,113.45) ; v1@92.473,131.102 92.733,130.842 U7.5@94.102,130.842 ; U7.5@93.895,130.672 U7.5@94.102,130.672
  Bottom Layer w0.254: v1@86.775,113.36 85.864,113.36 85.252,113.972 85.252,114.455 87.799,117.002 87.799,126.549 92.331,131.081 v1(92.452,131.081)
D19: U1.131 U7.7 | length 21.7
  Top Layer w0.254: U1.131@84.011,113.546 84.034,113.569 85.394,113.569 v1(86.05,114.225) ; v1@92.908,129.434 93.167,129.175 93.927,129.175 U7.7@94.102,129.35
  Bottom Layer w0.254: v1(86.05,114.225) 86.05,114.504 88.253,116.707 88.253,124.638 92.699,129.084 92.723,129.084 92.855,129.216 v1(92.855,129.381)
D20: U1.134 U7.8 | length 20.8
  Top Layer w0.254: U1.134@84.011,115.046 84.027,115.062 86.52,115.062 v1@87.1,114.482 ; v1(93,128.357) U7.8@94.017,128.357
  Bottom Layer w0.254: v1@87.05,114.481 87.05,114.73 88.707,116.387 88.707,124.282 92.782,128.357 v1(93,128.357)
  other v1: 87.054,114.481
D21: U1.135 U7.10 | length 24.3
  Top Layer w0.254: U1.135@84.011,115.546 85.279,115.546 ; 85.3,115.525 85.279,115.546 ; v1(87.775,112.9) 87.635,113.04 87.635,114.029 87.781,114.175 87.781,114.782 87.017,115.546 85.279,115.546 ; v1(92.586,126.802) U7.10@93.971,126.802 ; U7.10@93.849,126.925 U7.10@93.971,126.802 ; U7.10@94.062,126.802 U7.10@93.971,126.802 ; U7.10@94.102,126.672 94.017,126.757 U7.10@93.971,126.802
  Bottom Layer w0.254: v1(87.775,112.9) 87.635,113.04 87.635,114.029 89.161,115.555 89.161,123.927 92.028,126.794 92.586,126.794 v1(92.586,126.802)
D22: U1.136 U7.11 | length 21.9
  Top Layer w0.254: U1.136@84.011,116.046 87.159,116.046 88.375,114.83 v1@88.375,113.727 ; v1(93.03,125.831) 93.24,126.042 U7.11@94.102,126.042
  Bottom Layer w0.254: v1(88.362,113.727) 89.615,114.981 89.615,123.739 91.716,125.84 93.02,125.84 v1(93.03,125.831)
D23: U1.137 U7.13 | length 25
  Top Layer w0.254: U1.137@84.011,116.546 84.033,116.568 87.279,116.568 89.089,114.758 89.089,113.039 88.675,112.625 v1(88.675,112.375) ; v1(92.78,124.695) 93.05,124.425 U7.13@94.085,124.425 ; U7.13@93.895,124.272 U7.13@94.102,124.272
  Bottom Layer w0.254: v1(88.675,112.375) 88.675,113.013 90.069,114.407 90.069,123.551 91.045,124.527 92.611,124.527 v1(92.78,124.695)
D24: U1.138 U7.42 | length 39.9
  Top Layer w0.254: U1.138@84.011,117.046 87.443,117.046 89.543,114.946 89.543,112.13 90.881,110.792 92.681,108.992 101.411,108.992 104.255,111.836 104.255,123.655 104.249,123.661 104.249,124.024 104.725,124.5 105.074,124.5 U7.42@105.302,124.272
D25: U1.139 U7.44 | length 40.5
  Top Layer w0.254: U1.139@84.011,117.546 87.585,117.546 89.997,115.134 89.997,112.318 90.483,111.832 91.069,111.246 92.869,109.446 101.223,109.446 103.801,112.024 103.801,123.467 103.795,123.473 103.795,125.47 104.4,126.075 U7.44@104.722,126.075
D26: U1.140 U7.45 | length 41.1
  Top Layer w0.254: U1.140@84.011,118.046 84.034,118.069 87.704,118.069 90.451,115.323 90.451,112.506 93.057,109.9 101.035,109.9 103.347,112.212 103.347,123.279 103.341,123.285 103.341,125.841 104.4,126.9 U7.45@105.074,126.9
D27: U1.141 U7.47 | length 42
  Top Layer w0.254: U1.141@84.011,118.546 84.034,118.569 87.846,118.569 90.905,115.511 90.905,112.694 93.211,110.388 100.881,110.388 102.893,112.4 102.893,123.091 102.887,123.097 102.887,126.404 104.755,128.272 U7.47@105.302,128.272
D28: U1.142 U7.48 | length 42.6
  Top Layer w0.254: U1.142@84.011,119.046 88.011,119.046 91.359,115.699 91.359,112.883 93.399,110.842 100.693,110.842 102.439,112.588 102.439,122.902 102.433,122.909 102.433,127.158 104.55,129.275 105.099,129.275 105.217,129.157 U7.48@105.302,129.072
D29: U1.143 U7.50 | length 43.4
  Top Layer w0.254: U1.143@84.011,119.546 84.034,119.569 88.13,119.569 91.813,115.887 91.813,113.071 93.587,111.296 100.505,111.296 101.985,112.776 101.985,122.714 101.979,122.721 101.979,128.369 104.485,130.875 U7.50@105.099,130.875
D30: U1.144 U7.51 | length 44.1
  Top Layer w0.254: U1.144@84.011,120.046 84.034,120.069 88.272,120.069 92.267,116.075 92.267,113.259 93.775,111.75 100.317,111.75 101.531,112.964 101.531,122.526 101.525,122.532 101.525,128.975 104.225,131.675 105.099,131.675 105.217,131.557 U7.51@105.302,131.472
D31: U1.145 U7.53 | length 46
  Top Layer w0.254: U1.145@85.049,120.546 U1.145@84.011,120.546 88.437,120.546 92.721,116.263 92.721,113.447 93.867,112.3 100.225,112.3 101.077,113.152 101.077,122.338 101.071,122.344 101.071,129.771 104.6,133.3 U7.53@105.074,133.3 ; U7.53@104.925,133.072 U7.53@105.302,133.072
DAT0: J96.7 U1.179 U11.8 | length 40.2
  Top Layer w0.254: v1(56.15,136.85) v1@55.8,136.85 ; v1(61.75,143.575) 60.7,144.625 57.425,144.625 56.944,144.144 56.944,137.994 v1@55.8,136.85 ; U1.179@70.711,128.346 70.711,130.233 71.45,130.972 v1(71.45,132.2) ; v1@55.8,136.85 54.583,136.85 U11.8@54.512,136.779 55.729,136.779 v1@55.8,136.85
  Bottom Layer w0.254: v1(56.15,136.85) 56.25,136.75 57.125,136.75 61.525,132.35 71.442,132.35 71.45,132.342 v1(71.45,132.2) ; v1(61.75,143.575) 62.325,143.575 63.01,144.26 J96.7@63.01,145.278
DAT1: J96.8 U1.184 | length 20.4
  Top Layer w0.254: v1(66.35,134.725) 66.35,131.88 68.211,130.019 U1.184@68.211,128.346
  Bottom Layer w0.254: J96.8@61.91,145.278 60.875,144.243 60.875,140.125 v1@66.312,134.688
DAT2: J96.1 U1.183 | length 18.4
  Top Layer w0.254: v1(67.325,137.6) 67.325,131.547 68.711,130.161 U1.183@68.711,128.346
  Bottom Layer w0.254: v1(67.325,137.6) 67.325,140.175 69.625,142.475 J96.1@69.625,145.263
DAT3: J96.2 U1.182 | length 19.2
  Top Layer w0.254: v1@68.275,136.8 68.275,131.24 69.211,130.304 U1.182@69.211,128.346
  Bottom Layer w0.254: v1(68.35,136.8) 67.097,136.8 66.598,137.299 66.598,141.473 68.5,143.375 68.5,144.868 J96.2@68.51,144.878